# Altium PCB PCB1.PcbDoc (part 7 of 7)
Units mm, origin at the board's own origin, x right, y up, seen from the top; angles counter-clockwise.
Board outline 100 x 100 mm, 6 copper layers (Top, GND_1, Signal, PWR, GND_2, Bottom), stack 0.816 mm thick; 321 components, 260 nets, 1718 pads, 694 vias.
Unrouted connection lines stored in the file: 527.
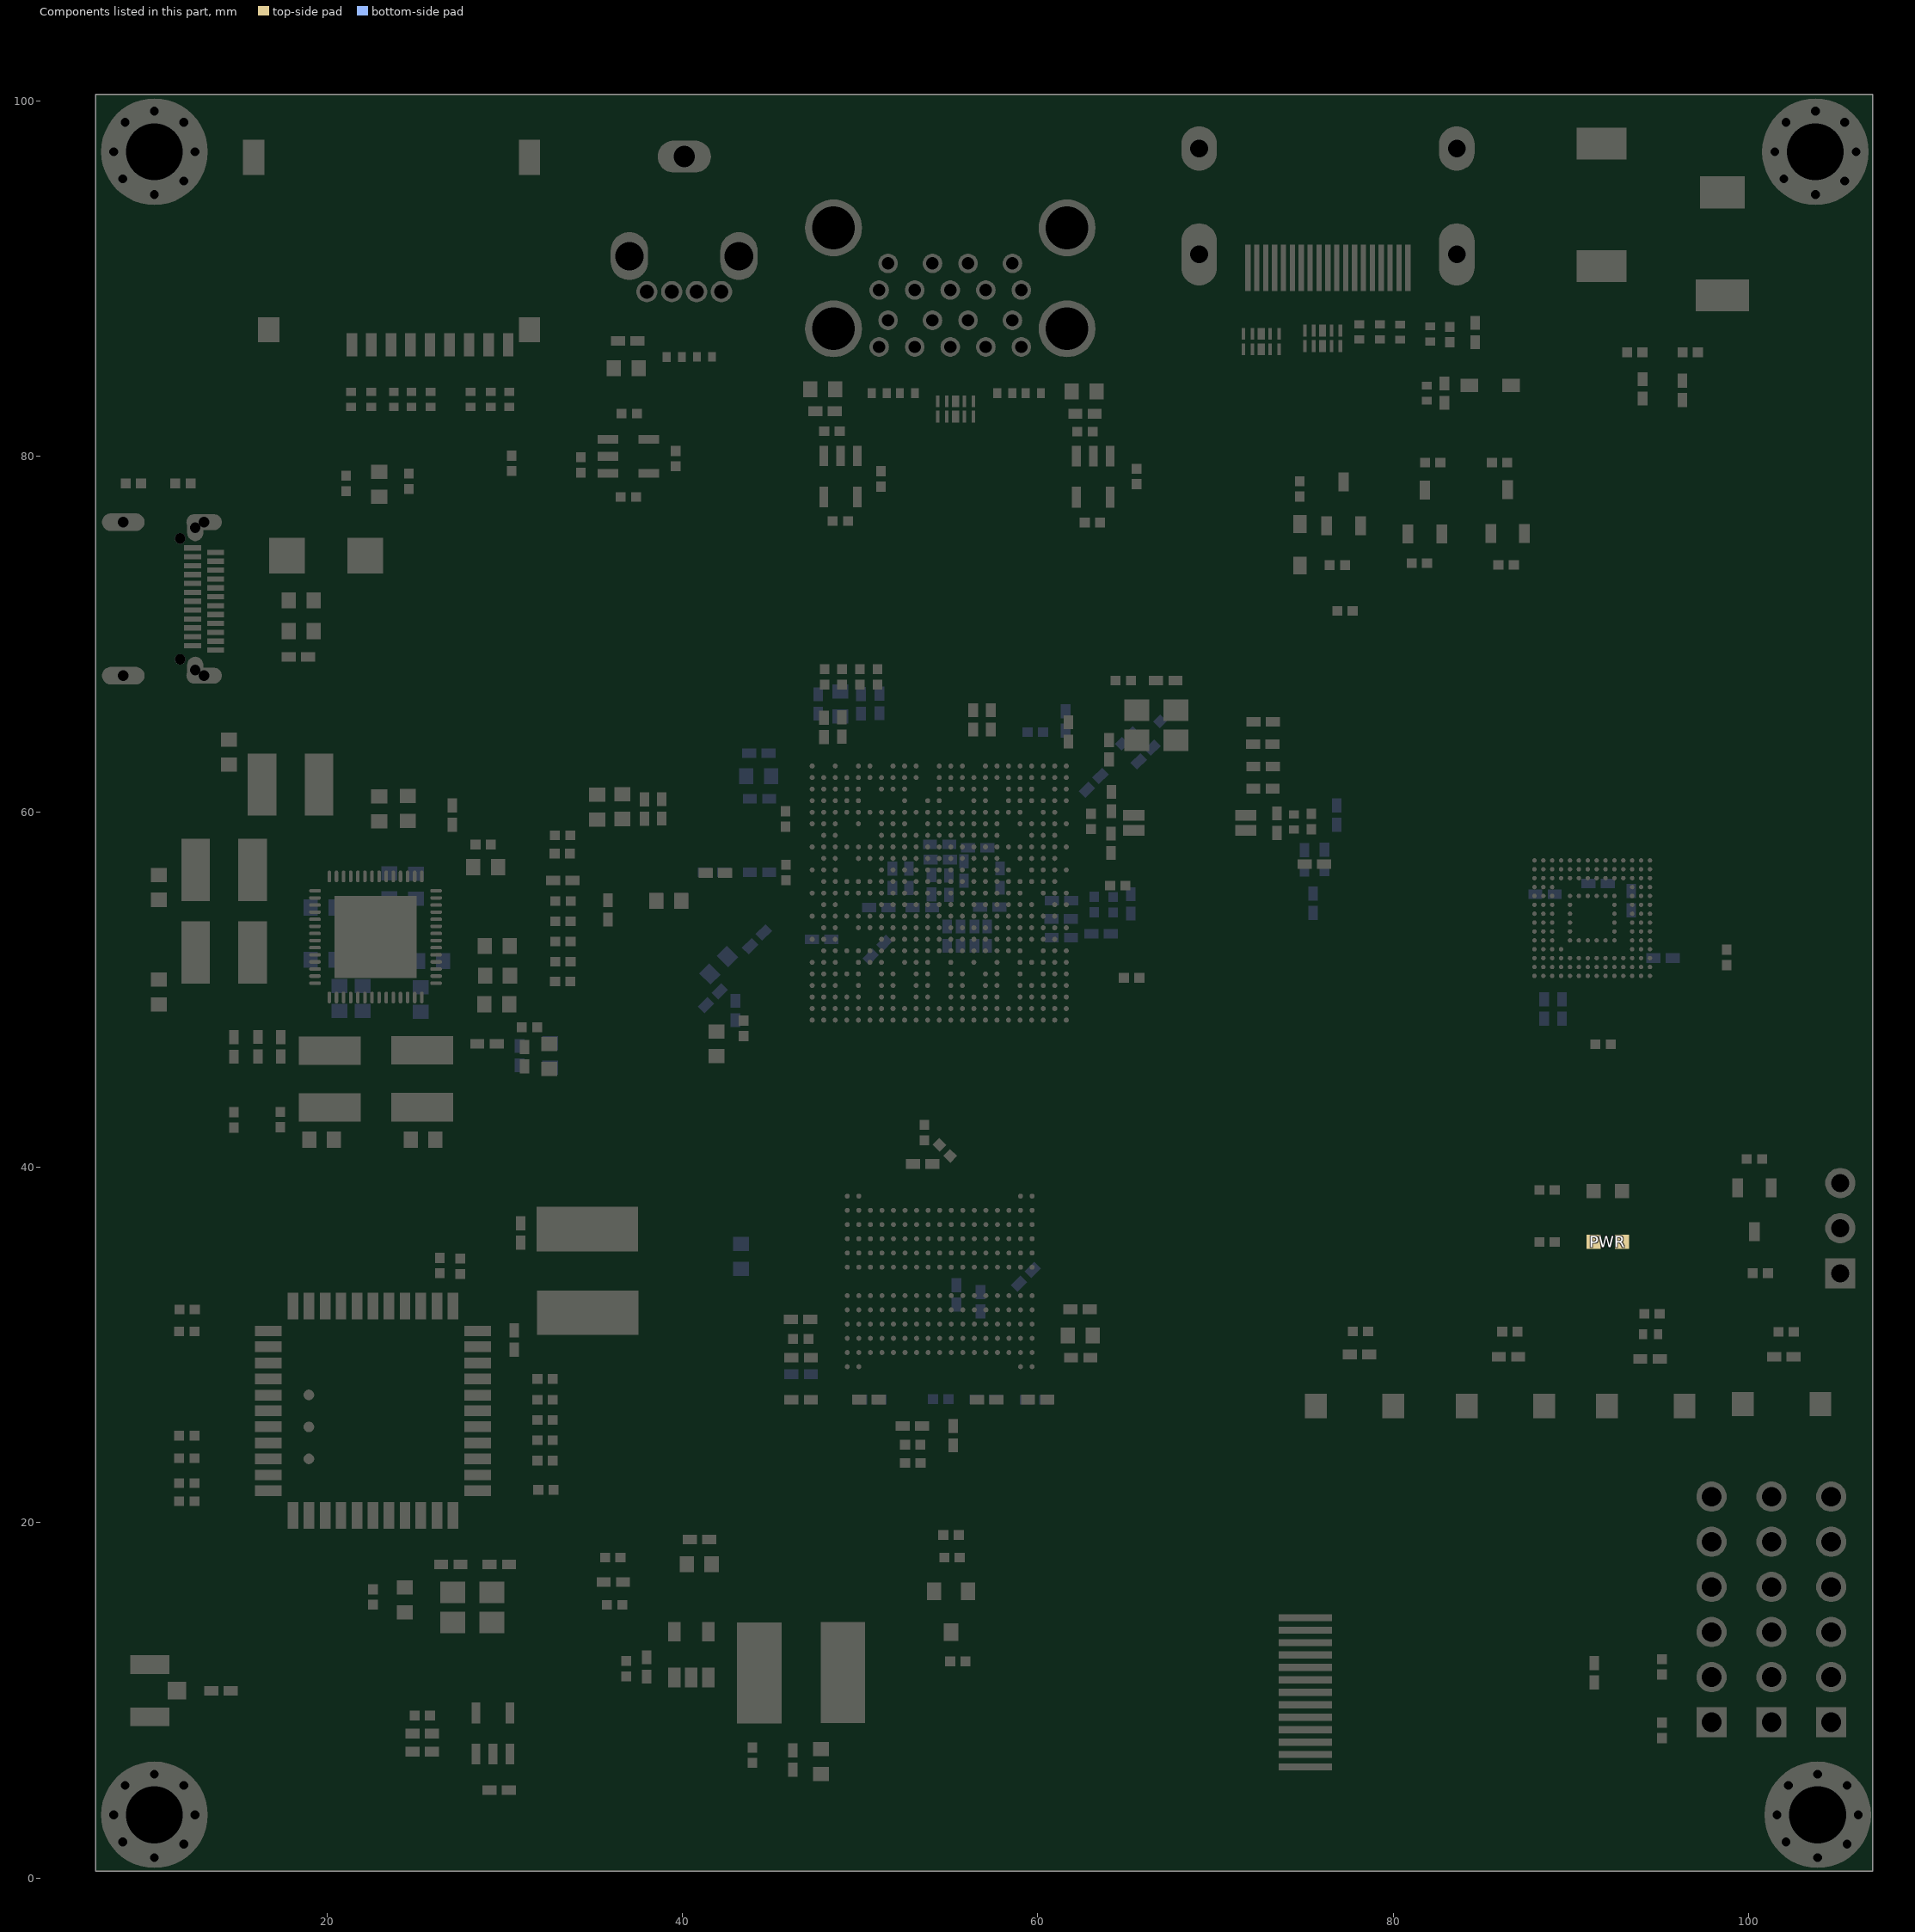
[diagram p10: the components of this part, seen from the top]

## Polygon pours and split planes (outlines as drawn) (continued)
PS on PWR "PS_L04_P021" (solid, pour order 21): 15.24,72.009 14.859,71.628 14.859,67.183 14.097,66.421 9.144,66.421 8.382,65.659 8.382,56.515 9.144,55.753 16.891,55.753 17.653,54.991 17.653,47.879 18.288,47.244 27.178,47.244 27.813,47.879 27.813,56.515 26.543,57.785 11.684,57.785 10.795,58.674 10.795,63.881 11.684,64.77 18.161,64.77 19.05,65.659 19.05,71.374 18.415,72.009
VDD_CPU on PWR "VDD_CPU_L04_P009" (solid, pour order 9): 11.43,63.807 11.43,58.727 11.864,58.293 56.134,58.293 56.769,57.658 56.769,53.774 56.896,53.647 58.039,53.647 58.293,53.901 58.293,58.801 57.023,60.071 16.817,60.071 16.002,60.886 16.002,63.553 15.24,64.315 11.938,64.315
VDD_GPU on PWR "VDD_GPU_L04_P023" (solid, pour order 23): 9.398,55.499 8.636,54.737 8.636,37.211 9.779,36.068 25.781,36.068 26.816,37.103 26.816,38.862 26.816,39.643 27.813,40.64 40.132,40.64 41.148,41.656 41.148,52.451 42.037,53.34 52.197,53.34 53.34,54.483 53.34,56.007 52.959,56.388 40.513,56.388 39.243,55.118 39.243,43.815 37.846,42.418 24.13,42.418 22.987,41.275 22.987,38.862 22.479,38.354 14.097,38.354 13.208,39.243 13.208,54.864 12.573,55.499
VDD09_HDMI on PWR "VDD09_HDMI_L04_P018" (solid, pour order 18): 19.812,42.672 19.177,43.307 19.177,45.212 20.066,46.101 35.179,46.101 36.068,46.99 36.068,57.023 37.211,58.166 56.007,58.166 56.769,57.404 56.769,56.896 56.388,56.515 40.005,56.515 38.862,55.372 38.862,43.815 37.719,42.672
VDD09_HDMI on PWR "VDD09_HDMI_L04_P022" (solid, pour order 22): 19.177,43.582 19.177,39.116 19.685,38.608 22.098,38.608 22.606,39.116 22.606,42.291 23.223,42.908
GND on Signal "GND_L03_P030" (solid, pour order 30): 6.933,0.117 106.973,0.117 106.979,0.123 106.941,0.16 106.941,100.101 6.924,100.101 6.916,100.093
GND on GND_1 "GND_L02_P031" (solid, pour order 31): 6.971,0.231 107.011,0.231 107.017,0.237 106.98,0.274 106.98,100.215 6.962,100.215 6.955,100.207
GND on GND_2 "GND_L05_P033" (solid, pour order 33): 6.971,0.277 107.011,0.277 107.017,0.283 106.98,0.321 106.98,100.261 6.962,100.261 6.955,100.253
GND on Bottom "GND_L06_P034" (solid, pour order 34): 6.951,0.123 106.991,0.123 106.997,0.129 106.96,0.167 106.96,100.107 6.942,100.107 6.935,100.1

## Other copper
Top:
  pour cut-out: 64.388,66.547 64.388,63.244 68.53,63.244 68.617,63.331 68.567,63.381 68.567,66.426 68.384,66.609 64.45,66.609
  pour cut-out: 65.154,55.698 62.456,53 62.456,51.854 63.214,51.096 63.299,51.181 66.04,51.181 66.04,50.336 66.132,50.244 83.989,50.244 84.742,49.491 92.445,49.491 92.445,49.681 91.768,50.357 91.703,50.292 87.754,50.292 87.373,50.673 87.373,53.643 86.708,54.308 86.708,55.5 86.215,55.993 66.56,55.993 66.214,55.647
  pour cut-out: 26.576,82.947 26.576,80.814 26.532,80.814 25.625,79.907 25.625,77.981 28.811,74.795 28.811,69.118 31.201,66.728 42.531,66.728 43.334,65.925 43.334,61.285 44.222,60.397 47.014,60.397 47.014,61.952 46.482,62.484 46.482,67.275 43.868,69.889 33.801,69.889 31.823,71.866 31.823,78.159 31.369,78.613 28.321,78.613 27.502,79.432 27.502,83.001
  pour cut-out: 43.554,49.46 43.554,34.444 44.628,33.37 63.202,33.37 63.843,34.011 64.009,34.011 64.009,49.591 63.17,50.431 44.545,50.431 44.535,50.441
  pour cut-out: 47.303,61.932 47.293,61.922 47.293,50.242 60.293,50.242 60.303,50.232 60.303,61.932
  pour cut-out: 52.91,66.213 52.91,63.875 54.076,62.709 55.541,62.709 55.55,62.718 55.569,62.698 55.828,62.698 55.828,66.114 55.756,66.186
  pour cut-out: 53.473,66.204 53.34,66.338 53.34,73.991 53.633,74.284 53.633,79.857 52.604,79.857 51.308,81.153 51.308,82.042 51.549,81.801 51.549,81.337 53.443,81.337 53.674,81.568 57.905,81.568 58.406,82.069 58.433,82.042 59.309,82.042 59.309,81.729 58.564,80.984 58.564,65.637 58.215,65.288 58.039,65.464 58.039,66.167
  pour cut-out: 71.678,91.822 71.634,91.779 71.634,89.282 71.373,89.282 70.699,88.608 70.699,86.09 69.429,86.09 66.621,83.283 66.621,77.67 58.855,69.904 58.855,65.132 59.729,65.132 60.632,64.229 60.861,64.457 60.861,66.428 61.358,66.428 72.389,77.46 72.313,77.537 72.313,79.63 73.329,80.646 74.842,80.646 77.214,83.018 77.214,88.939 77.583,89.308
GND_1:
  pour cut-out: 18.581,21.249 18.623,21.207 18.623,12.408 17.985,11.77 17.985,11.535 17.75,11.535 17.01,10.795 12.277,10.795 12.172,10.9 12.172,11.139 9.562,11.139 9.525,11.176 9.525,9.779 12.012,9.779 12.172,9.939 12.172,10.178 17.036,10.178 17.145,10.287 17.703,10.287 18.465,11.049 18.669,11.049 18.669,11.253 19.027,11.611 19.027,11.915 19.431,12.319 19.431,21.198 19.381,21.249
Bottom:
  pour cut-out: 45.834,50.78 44.402,49.348 44.402,32.305 48.755,27.951 55.938,27.951 56.378,27.51 63.296,27.51 64.529,28.743 64.529,50.366 63.612,51.283 55.772,51.283 55.139,50.65 54.973,50.816 53.023,50.816
  pour cut-out: 48.373,58.397 46.332,58.397 45.271,57.336 42.53,57.336 42.53,55.895 42.596,55.829 46.203,55.829 48.23,57.857

## Silkscreen, mask and mechanical layers (free items; w line width, h text height)
Top Overlay:
  drawing of 21 lines, arcs and shapes, not listed
  text "VCC IN 5V@2A" at 7.621,80.678 h1.52
  text "Android OS" at 90.845,64 h2
  text "Linux OS" at 26.289,63.776 h2
  text "Allwinner-H6" at 75.703,42.262 h2
  text "Debug" at 102.743,42.069 h1.52
  text "Author: myry" at 75.69,40.761 h2
  text "GND" at 101.981,38.998 h0.8
  text "2025.11" at 75.69,38.884 h2
  text "RX" at 102.256,36.373 h0.8
  text "TX" at 102.297,33.706 h0.8
  text "PWR ON" at 75.04,23.631 h1.52
  text "BOOT" at 84.74,23.631 h1.52
  text "RST" at 92.891,23.631 h1.52
  text "REC" at 100.461,23.631 h1.52

## Text inside footprints (layer, text, board x,y; h text height)
LCD1: Top Overlay "1" at 76.937,6.44 h2.03 r270